# Altium PCB 拼版-三相驱动板+6050+6651+1308.PcbDoc
Units mil, origin at the board's own origin, x right, y up, seen from the top; angles counter-clockwise.
Board outline 3937.01 x 3937.01 mil, 2 copper layers (Top Layer, Bottom Layer); 7 components, 91 nets, 17 pads, 4 vias.
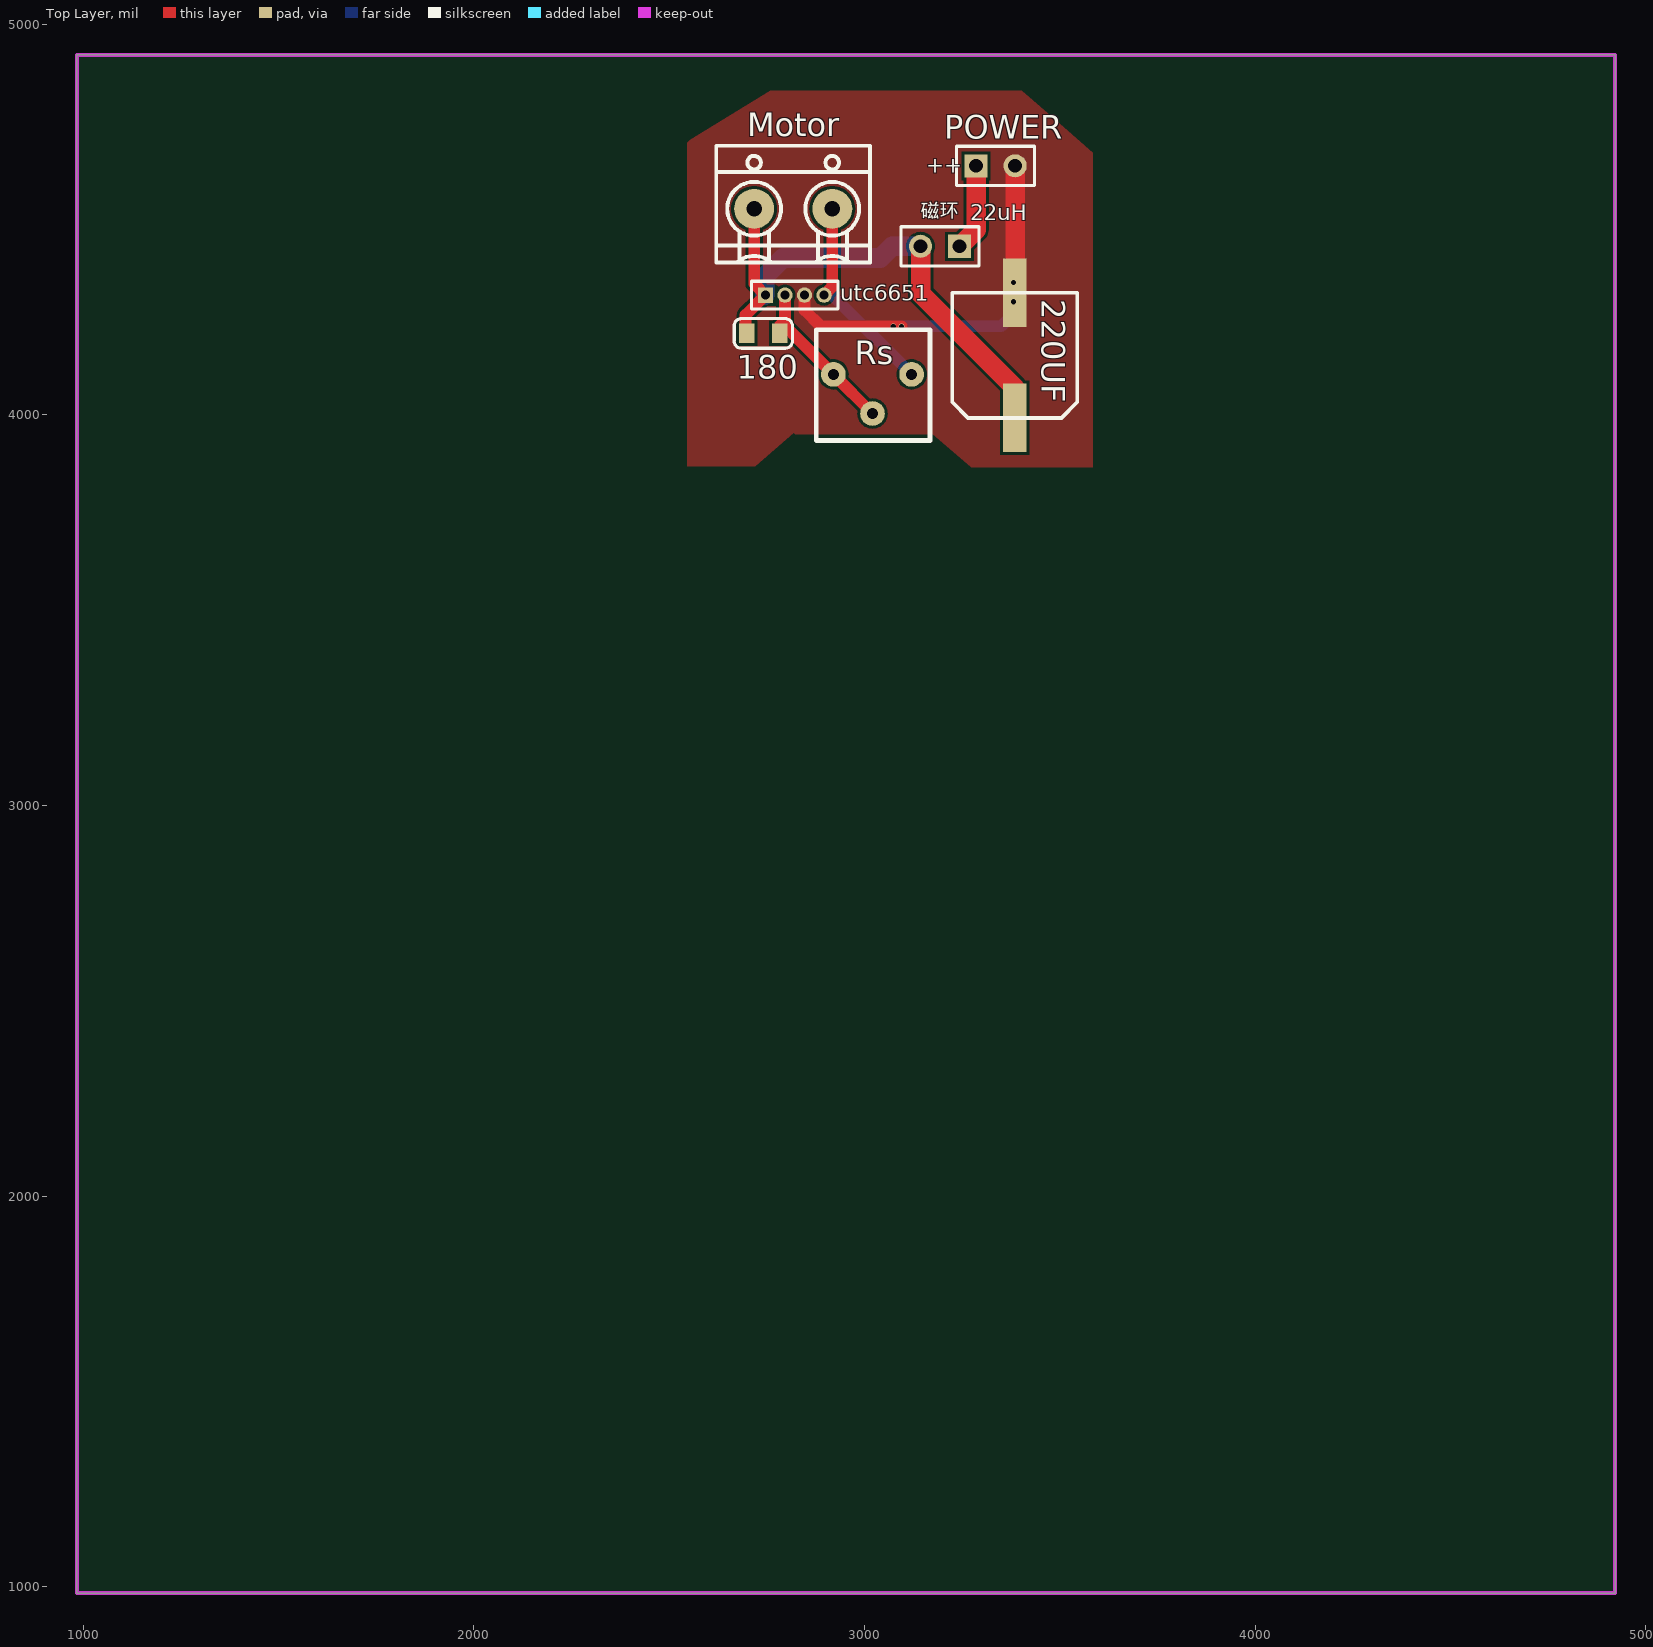
[diagram p0: Top Layer view]
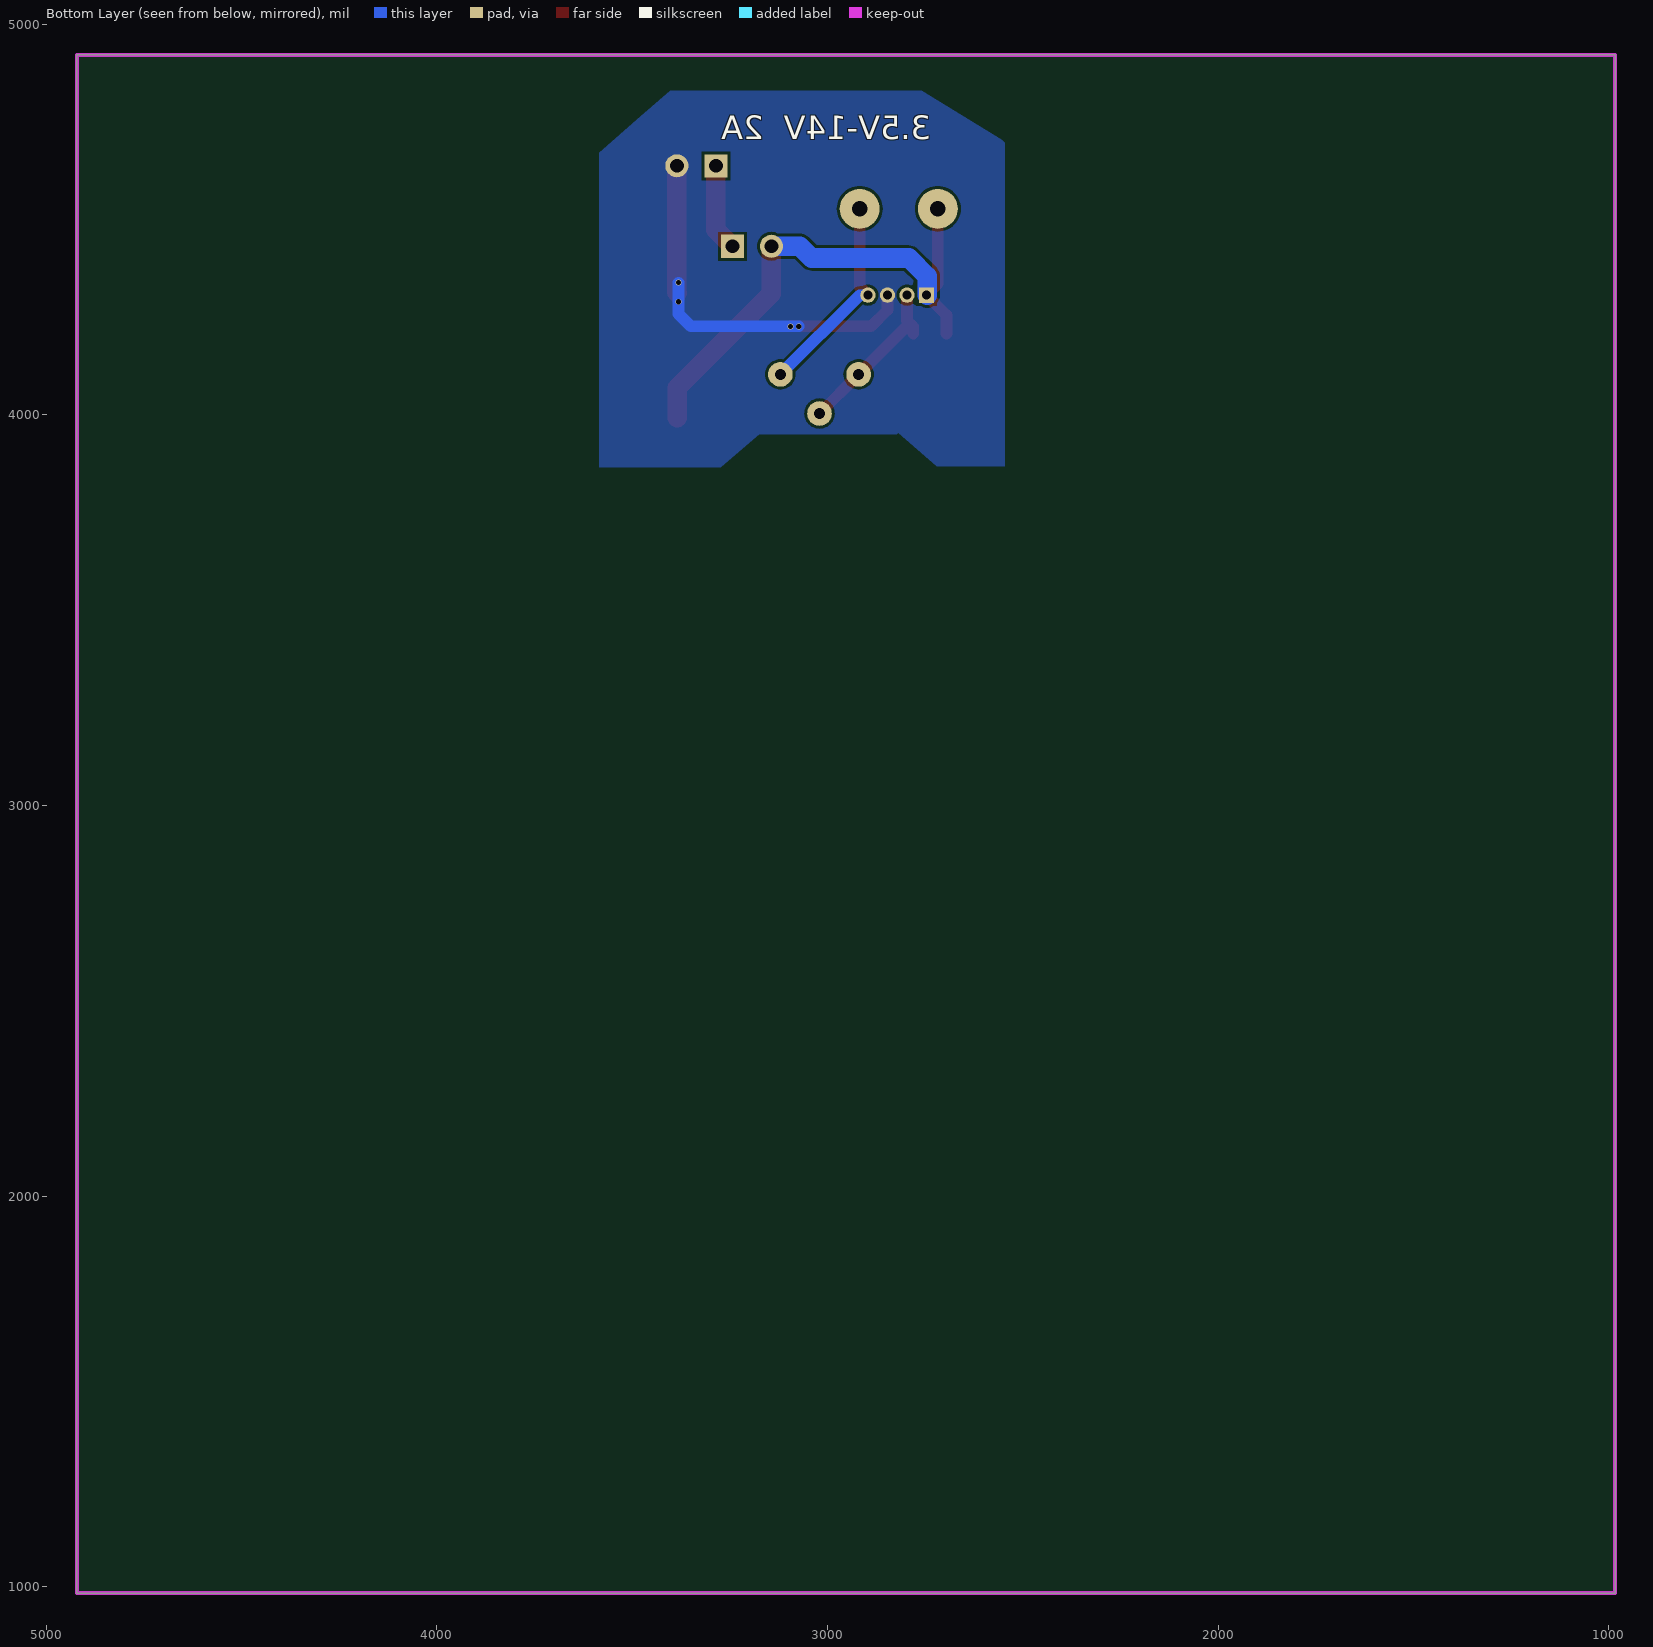
[diagram p1: Bottom Layer view, seen from below]

## Layer stack, top to bottom
Top Layer: signal copper 1.4
Dielectric: dielectric 12.6, FR-4, Dk 4.8
Bottom Layer: signal copper 1.4

## Board outline
984.25,984.25 4921.26,984.25 4921.26,4921.26 984.25,4921.26

## Design rules (kind name [scope] priority, off if disabled: settings)
Clearance [All] p1: gap=7
ComponentClearance [All] p1 off: gap=10 collisioncheckmode=3 verticalgap=10 showdistances=FALSE
PolygonConnect [All] p1: connectstyle=Direct reliefconductorwidth=10 reliefentries=4 polygonreliefangle="90 Angle"
RoutingVias [All] p1: holewidth=13 width=15 viastyle="Through Hole" minholewidth=13 minwidth=15 maxholewidth=50 maxwidth=100
SilkscreenOverComponentPads [All] p1: minsilkscreentomaskgap=10
SolderMaskExpansion [All] p1: expansion=4
Width Width_1 [All] p1: maxlimit=150 minlimit=8 preferedwidth=15
26 further rules are at their usual default settings.

## Classes and differential pairs
component class Sheet1: 1K_4_- 1K_5__ 10k_3_ 30pf 104- change

## Components (designator, comment, footprint, x,y, rotation, side; value= is the part's Value field where it differs from the comment)
180 "Res2" "RES 0805_1" 2698.6,4208.4 r0 top
220UF "Cap Pol1" capso_8*10 3384.6,4152.4 r270 top
Motor "Header 2" ED120/2DS_1 2917.6,4527.4 r180 top
POWER "Header 2" HDR1X2 3285.6,4637.4 r0 top
Rs "MHDR1X3" pot（正方形） 2962.6,4178.4 r270 top
utc6651 "Header 4" MHDR1X4 2746.6,4306.4 r0 top
磁环 "Header 2" HDR1X2 3243.6,4431.4 r180 top

## Footprints (in the part's own frame and the unit in brackets; to place one, negate y for a bottom-side part, rotate by r counter-clockwise, add the part's x,y. Pads: shape width x height; smd on the part's side, far side on the other; paste and mask are expansions set on the pad)
capso_8*10 [mil]
  rect 175x60 smd: 1(160,0) 2(-160,0)
  silkscreen extent -160,-160 160,160, body extent -192,-162 198,164, height 402
ED120/2DS_1 [mm]
  round 2.6 hole 1: 1(0,0) 2(5.08,0)
  silkscreen extent -2.46,-4.1 7.54,3.5
HDR1X2 [mm] "Connector; Header; 2 Position"
  rect 1.5x1.5 hole 0.9: 1(0,0)
  round 1.5 hole 0.9: 2(2.54,0)
  silkscreen extent -1.27,-1.27 3.81,1.27
MHDR1X4 [mm] "Connector; Header; 4 Position"
  rect 1x1 hole 0.6: 1(0,0)
  round 1 hole 0.6: 2(1.27,0) 3(2.54,0) 4(3.81,0)
  silkscreen extent -0.9,-0.9 4.71,0.9
pot（正方形） [mm]
  round 1.6 hole 0.7: 1(1.905,-1.067) 2(4.445,1.473) 3(1.905,4.013)
  silkscreen extent -0.99,-2.18 6.2,5.21
"RES 0805_1" [mil]
  rect 40x50 smd: 1(0,0) 2(85,0)
  silkscreen extent -32,-38 117,38, body extent 3,-25 82,25, height 30

## Part data
220UF: "Polarized Capacitor (Radial)"
Motor: "H"
POWER 磁环: "Header, 2-Pin"
utc6651: "Header, 4-Pin"

## Via types
v1: diameter 15, hole 13, Top Layer to Bottom Layer, 4 vias

## Nets (pads, with @x,y where several pads share a name; then routed paths per layer and width w, separated by ;. In a path a pad name is that pad's centre, name@x,y a point inside that pad or via, vN(x,y) a via of type N, cw(c..) or ccw(c..) an arc to the next point about the centre after c; other vN are vias at no path point)
00: 
11: 
22: 
33: 
44: 
55: 
66: 
77: 
88: 
99: 
555_OUT: 
+3V3: 
A: 
AD-DRV: 
CLOCK: 
COM: 
COM_TO: 
CP: 
CPN: 
CPP: 
CS: 
DIG_VCC: 
FG: 
FR: 
FS: 
GND: 
GND_DRV: 
GROUND_DRV: 
KEY1: 
KEY2: 
KEY3: 
KEY4: 
KEY5: 
LD: 
MCU_PWM: 
Net0R_1_2: 
Net0R_4_1: 
Net0R_5_1: 
Net1K_1_1: 
Net1K_3_1: 
Net1K_4_1: 
Net1K_4_-_1: 
Net1K_5_1: 
Net1K_5___1: 
Net1K_6_1: 
Net1K_6_2: 
Net1uf__1: 
Net5k_adj_1: 
Net10k_0_1: 
Net10k_2__1: 
Net10k_3__2: 
Net100p_2: 
Net104_555_2: 
Net500k_adj_3: 
Net5824_3_1: 
Net5824_3_2: 
NetCD4001_3: 
NetCD4001_4: 
NetCD4001_11: 
NetI/O_4: 
NetI/O_5: 
NetI/O_6: 
NRST: 
OSCIN: 
OSCOUT: 
PWM: 
Q1: 
Q1-: 
Q2: 
Q2-: 
Q3: 
Q3-: 
Q11: 
Q33: 
Q55: 
Q111: 
Q333: 
RD: 
RX: 
SCL: 
SDA: 
SWIM: 
TX: 
U: 
V: 
V5: 
VCC: 
VCC_DRV: 
VCP: 
W: 
传5V: 
pads on no net: 180.1 180.2 220UF.1 220UF.2 Motor.1 Motor.2 POWER.1 POWER.2 Rs.1 Rs.2 Rs.3 utc6651.1 utc6651.2 utc6651.3 utc6651.4 磁环.1 磁环.2
copper on no net: | length 3597.6
  Top Layer w30: 2695.6,4208.4 2695.6,4255.4 2746.6,4306.4 2717.6,4335.4 2717.6,4527.4 ; 2780.6,4208.4 2780.6,4225.4 ; 2796.6,4306.4 2796.6,4241.4 2780.6,4225.4 ; 2846.6,4306.4 2846.6,4268.4 2888.6,4226.4 v1(3073.6,4226.4) v1(3094.6,4226.4) ; 2896.6,4306.4 2917.6,4327.4 2917.6,4527.4 ; 3020.6,4003.4 2920.6,4103.4 2798.6,4225.4 2780.6,4225.4
  Top Layer w50: 3143.6,4431.4 3143.6,4310.4 3384.6,4069.4 3384.6,3992.4 ; 3243.6,4431.4 3285.6,4473.4 3285.6,4637.4 ; 3384.6,4312.4 3385.6,4313.4 3385.6,4637.4
  Bottom Layer w30: 2896.6,4306.4 2917.6,4306.4 3120.6,4103.4 ; v1(3073.6,4226.4) v1(3094.6,4226.4) 3349.6,4226.4 3381.6,4258.4 v1(3381.6,4338.4)
  Bottom Layer w50: 2744.92,4306.4 2744.92,4354.71 2791.6,4401.4 3040.6,4401.4 3070.6,4431.4 3143.6,4431.4
  other v1: 3381.6,4289.4

## Polygon pours and split planes (outlines as drawn)
no net on Top Layer "Top Layer-No Net" (solid, remove dead copper, pour order 14): 2554.46,4703.69 2546.6,4696.9 2546.6,3868.79 2720.42,3868.79 2818.63,3953.73 2822.55,3950.33 3172.15,3950.33 3175.1,3950.33 3273.3,3865.4 3274.28,3866.24 3584.6,3866.24 3584.6,4671.42 3477.56,4764 3401.95,4829.4 2758.72,4829.4
no net on Bottom Layer "Top Layer-No Net" (solid, remove dead copper, pour order 13): 2554.46,4703.69 2546.6,4696.9 2546.6,3868.79 2720.42,3868.79 2818.63,3953.73 2822.55,3950.33 3172.15,3950.33 3175.1,3950.33 3273.3,3865.4 3274.28,3866.24 3584.6,3866.24 3584.6,4671.42 3477.56,4764 3401.95,4829.4 2758.72,4829.4

## Keep-outs
Keep-Out Layer:
  the board outline again, w10

## Silkscreen, mask and mechanical layers (free items; w line width, h text height)
Top Overlay:
  text "++" at 3158.6,4619.4 h40
  text "22uH" at 3270.6,4498.4 h40
Bottom Overlay:
  text "3.5V-14V  2A" at 2734.6,4705.4 h60